# Altium PCB PCB_BoargV1_1.PcbDoc
Units mm, origin at the board's own origin, x right, y up, seen from the top; angles counter-clockwise.
Board outline 66.68 x 33.27 mm, 2 copper layers (Top Layer, Bottom Layer); 57 components, 60 nets, 253 pads, 26 vias.
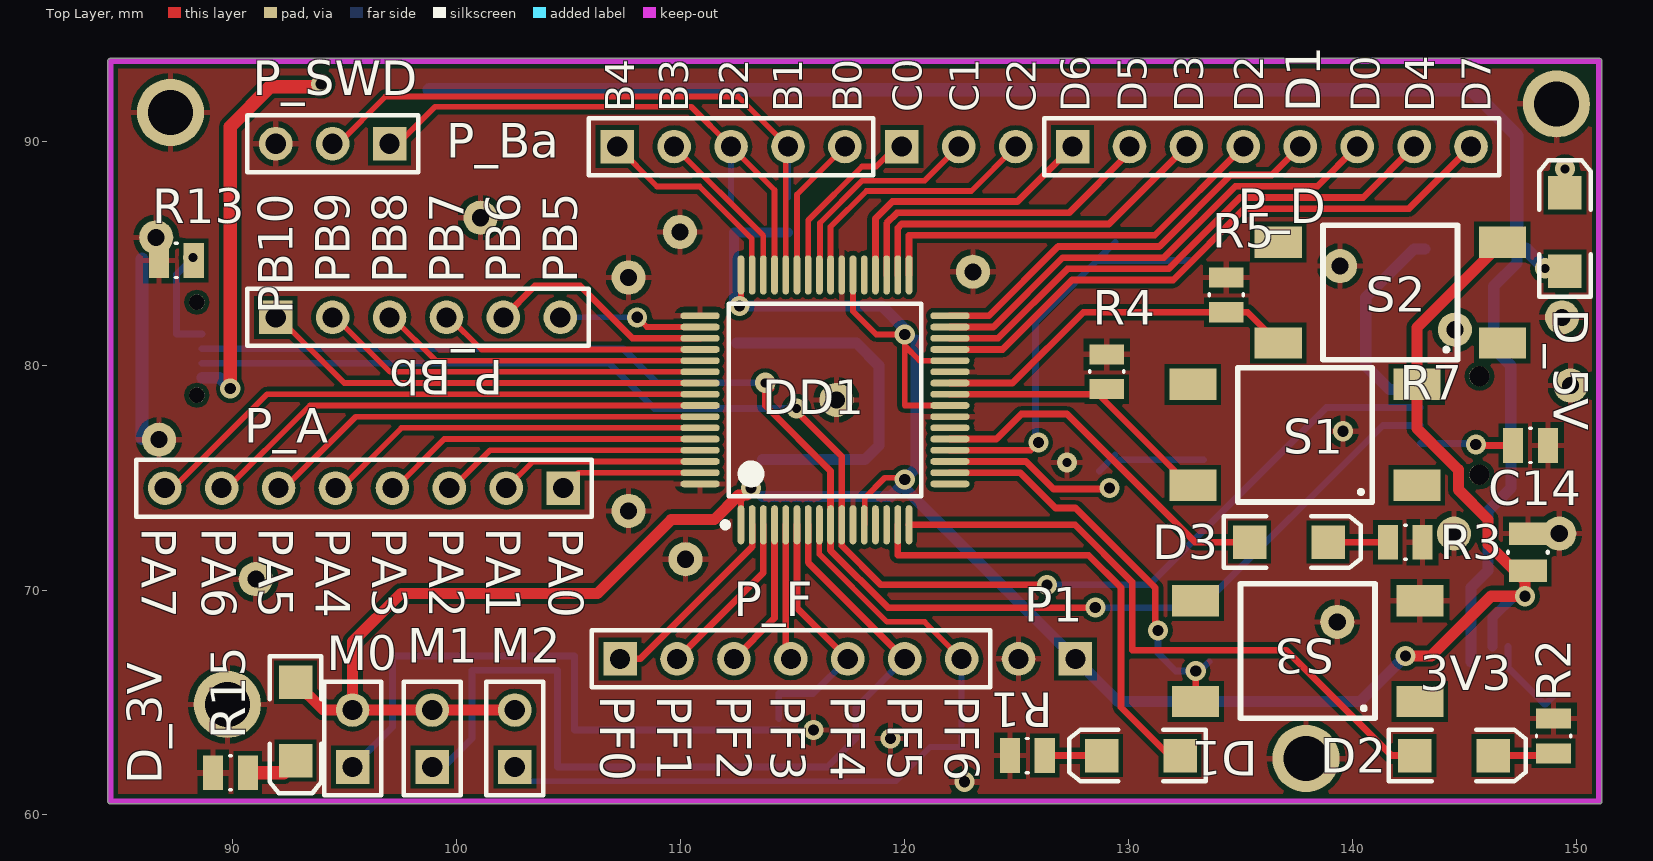
[diagram p0: Top Layer view]
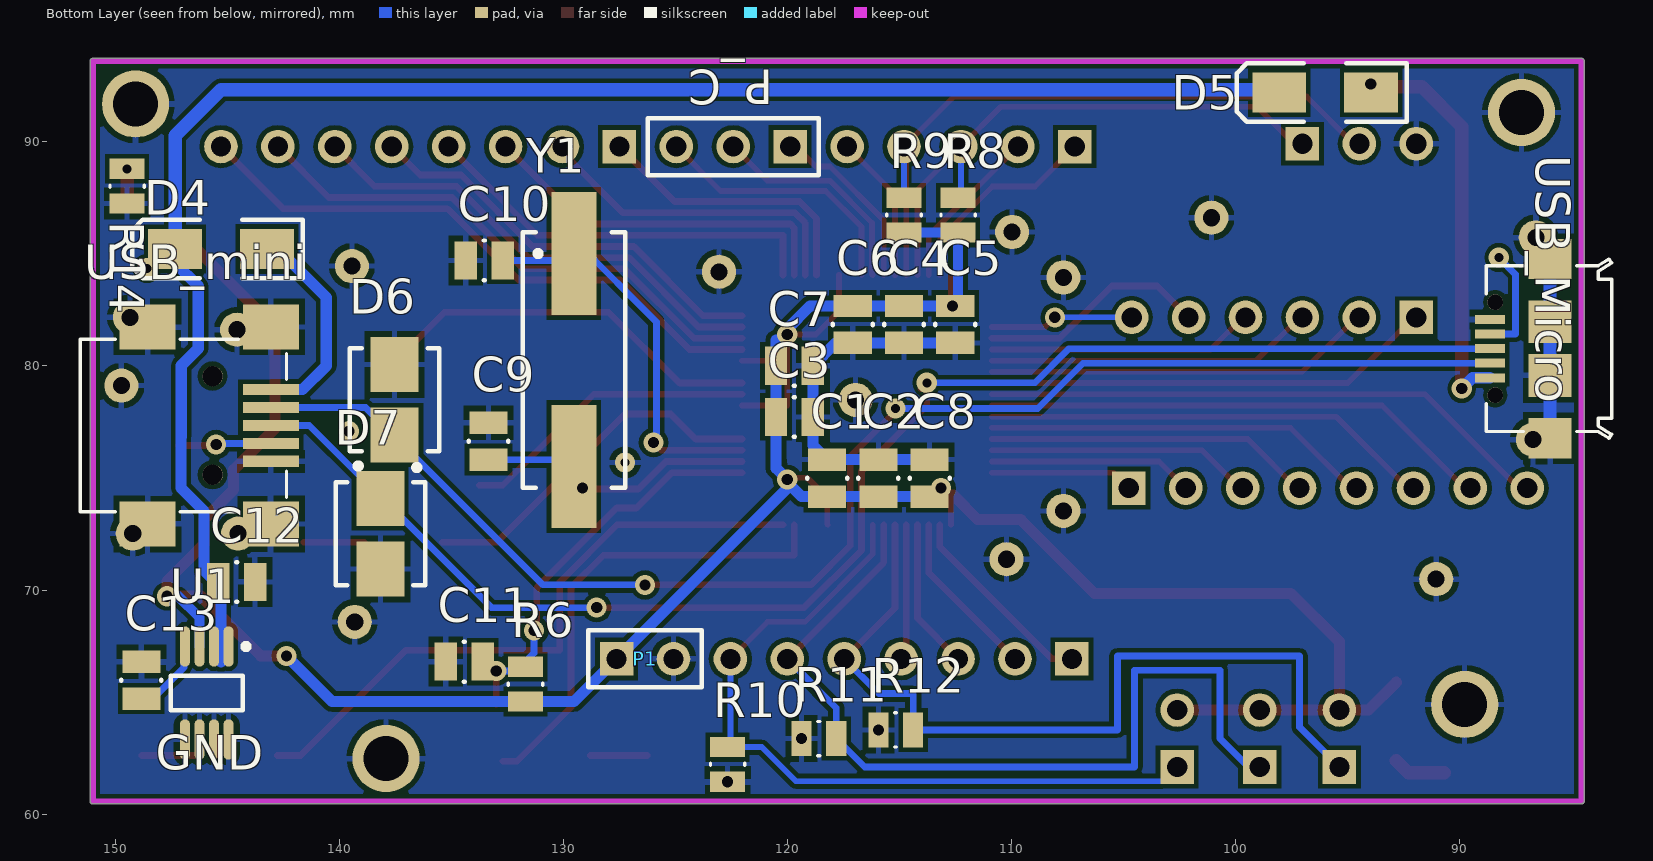
[diagram p1: Bottom Layer view, seen from below]
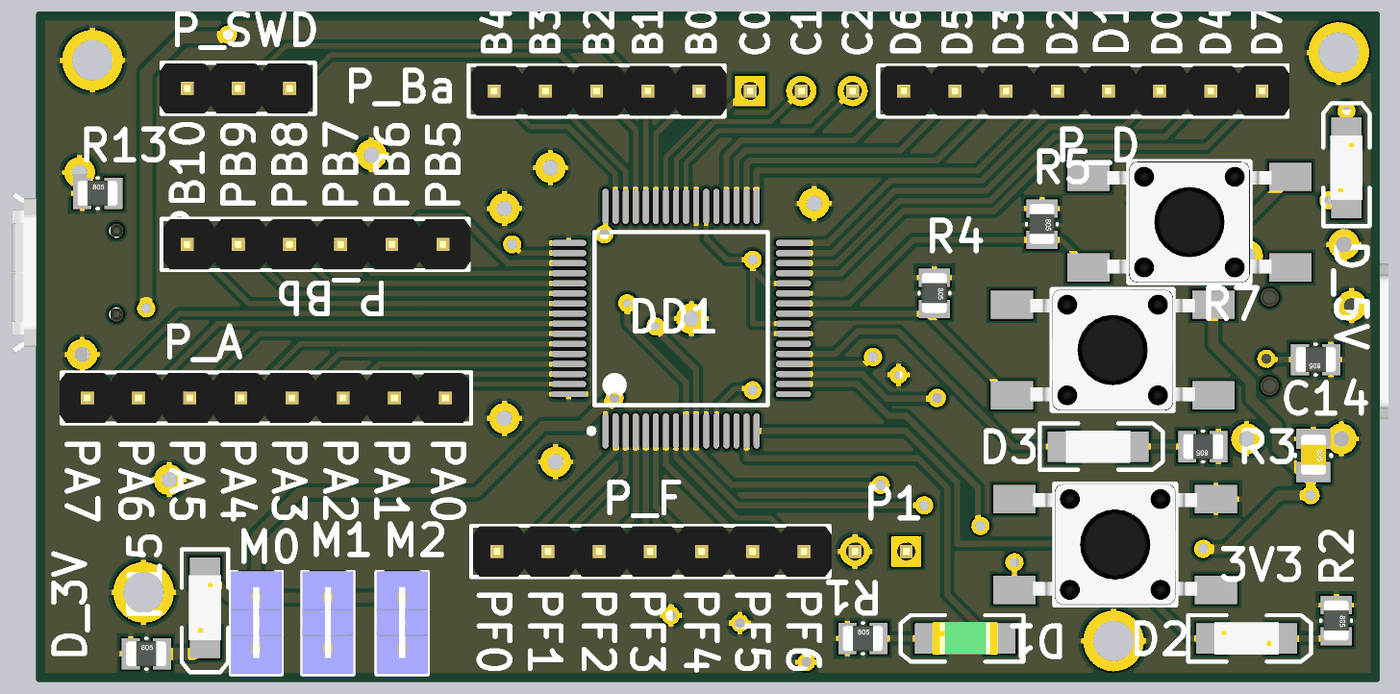
[diagram p2: 3D render of the assembled board from above, using the file's embedded part models]
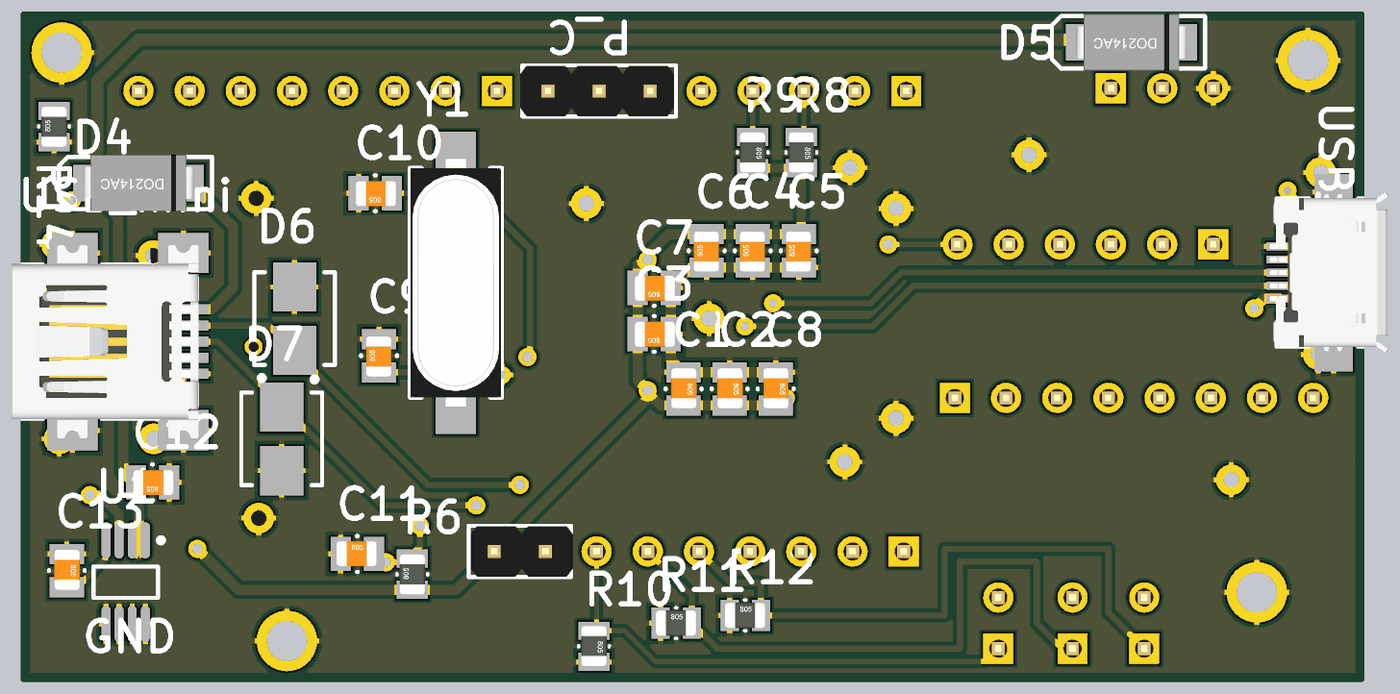
[diagram p3: 3D render of the assembled board from below, using the file's embedded part models]

## Layer stack, top to bottom
Top Solder: solder mask 0.0102, Solder Resist, Dk 3.5
Top Layer: signal copper 0.0356
Dielectric 1: dielectric 0.32, FR-4, Dk 4.8
Bottom Layer: signal copper 0.0356
Bottom Solder: solder mask 0.0102, Solder Resist, Dk 3.5

## Board outline
84.455,60.579 ccw(c84.582,60.579) 84.582,60.452 151.003,60.452 ccw(c151.003,60.579) 151.13,60.579 151.13,93.599 ccw(c151.003,93.599) 151.003,93.726 84.582,93.726 ccw(c84.582,93.599) 84.455,93.599

## Design rules (kind name [scope] priority, off if disabled: settings)
Clearance [All] p1: gap=0.2
PolygonConnect [All] p1: connectstyle=Relief reliefconductorwidth=0.254 reliefentries=4 polygonreliefangle="90 Angle" airgapwidth=0.254
RoutingVias [All] p1: holewidth=0.6 width=1.27 viastyle="Through Hole" minholewidth=0.4 minwidth=0.8 maxholewidth=0.5 maxwidth=0.9
SolderMaskExpansion [All] p1: expansion=0.102
Width Width_3V3 [InNet('3.3V')] p1: maxlimit=0.9 minlimit=0.254 preferedwidth=0.5
Width Width_5V [InNet('5V')] p2: maxlimit=0.9 minlimit=0.254 preferedwidth=0.5
Width Width_GND [InNet('GND')] p3: maxlimit=0.9 minlimit=0.254 preferedwidth=0.5 minimp=50.000000 maximp=50.000000 favimp=50.000000
Width [All] p4: maxlimit=0.6 minlimit=0.254 preferedwidth=0.3
29 further rules are at their usual default settings.

## Components (designator, comment, footprint, x,y, rotation, side; value= is the part's Value field where it differs from the comment)
C1 "CAP" C0805C 118.237,75.819 r270 bottom
C2 "CAP" C0805C 115.951,75.819 r270 bottom
C3 "CAP" C0805C 118.872,77.724 r0 bottom
C4 "CAP" C0805C 114.808,81.026 r90 bottom
C5 "CAP" C0805C 112.522,81.026 r90 bottom
C6 "CAP" C0805C 117.094,81.026 r90 bottom
C7 "CAP" C0805C 118.872,80.01 r0 bottom
C8 "CAP" C0805C 113.665,75.819 r270 bottom
C9 "CAP" C0805C 133.35,75.819 r90 bottom
C10 "CAP" C0805C 132.715,84.709 r0 bottom
C11 "CAP" C0805C 135.255,66.802 r180 bottom
C12 "CAP" C0805C 143.764,70.358 r0 bottom
C13 "CAP" C0805C 148.844,66.802 r270 bottom
C14 "CAP" C0805C 147.828,72.517 r270 top
D1 "LED" LED1206G 130.556,62.611 r180 top
D2 "LED" LED1206R 144.526,62.611 r0 top
D3 "LED" LED1206Y 137.16,72.136 r0 top
D4 "Diode" DSO-C2/X1.8 145.288,85.217 r0 bottom
D5 "Diode" DSO-C2/X1.8 96.012,92.202 r0 bottom
D6 "DiodeTVS" DIOM4336X22N 137.541,78.486 r90 bottom
D7 "DiodeTVS" DIOM4336X22N 138.176,72.517 r270 bottom
D_3V "LED" LED1206R 92.837,64.135 r270 top
D_5V "LED" LED1206R 149.479,85.979 r90 top
DD1 "К1986ВЕ92Q" TSQFP50P1200X1200X160-64N 116.459,78.486 r90 top
M0 "Header 2" HDR1X2J 95.377,62.103 r90 top
M1 "Header 2" HDR1X2J 98.933,62.103 r90 top
M2 "Header 2" HDR1X2J 102.616,62.103 r90 top
P1 "Header 2" HDR1X2 127.635,66.929 r180 bottom
P_A "Header 8" HDR1X8 104.775,74.549 r180 top
P_Ba "Header 5" HDR1X5 107.188,89.789 r0 top
P_Bb "Header 6" HDR1X6 91.948,82.169 r0 top
P_C "Header 3" HDR1X3 119.888,89.789 r0 bottom
P_D "Header 8" HDR1X8 127.508,89.789 r0 top
P_F "Header 7" HDR1X7 107.315,66.929 r0 top
P_SWD "Header 3" HDR1X3 97.028,89.916 r180 top
R1 "RES" C0805R 124.714,62.611 r0 top
R2 "RES" C0805R 148.971,64.262 r270 top
R3 "RES" C0805R 143.129,72.136 r180 top
R4 "RES" C0805R 129.032,80.518 r270 top
R5 "RES" C0805R 134.366,83.947 r270 top
R6 "RES" C0805R 131.699,65.024 r90 bottom
R7 "RES" C0805R 148.717,76.454 r180 top
R8 "RES" C0805R 112.395,87.503 r270 bottom
R9 "RES" C0805R 114.808,87.503 r270 bottom
R10 "RES" C0805R 122.682,62.992 r270 bottom
R11 "RES" C0805R 119.38,63.373 r180 bottom
R12 "RES" C0805R 115.951,63.754 r180 bottom
R13 "RES" C0805R 86.741,84.709 r0 top
R14 "RES" C0805R 149.479,87.249 r90 bottom
R15 "RES" C0805R 89.154,61.849 r0 top
S1 "SPST-NO" SPST-NO 142.875,74.676 r90 top
S2 "SPST-NO" SPST-NO 146.685,81.026 r90 top
S3 "SPST-NO" SPST-NO 143.002,65.024 r90 top
U1 "ADP1715ARMZ-3.3-R7" ADI-RM-8_N 145.923,65.405 r270 bottom
USB_Micro "Micro USB 2.0 Type B" 629105136821 85.979,80.772 r90 bottom
USB_mini "Mini USB 2.0 Type B" 65100516121 146.939,77.343 r270 bottom
Y1 "XTAL" "HC49SMD C" 129.54,80.264 r270 bottom

## Footprints (in the part's own frame and the unit in brackets; to place one, negate y for a bottom-side part, rotate by r counter-clockwise, add the part's x,y. Pads: shape width x height; smd on the part's side, far side on the other; paste and mask are expansions set on the pad)
65100516121 [mm] "Mini USB 2.0 Type B SMT Horizontal 5 Contacts"
  rect 0.5x2.5 smd: 1(-1.6,3.875) 2(-0.8,3.875) 3(0,3.875) 4(0.8,3.875) 5(1.6,3.875)
  round 0.9 hole 0.9 unplated: M1(-2.2,1.275) M2(2.2,1.275)
  rect 2x2.5 smd: S1(-4.4,3.875) S2(4.4,3.875) S3(-4.4,-1.625) S4(4.4,-1.625)
  silkscreen extent -3.85,-4.62 3.85,4.58, body extent -4.8,-4.62 4.8,4.63, height 3.92
629105136821 [mm] "Micro USB 2.0 SMT Type B Horizontal 5 Contacts"
  rect 0.4x1.35 smd: 1(-1.3,2.675) 2(-0.65,2.675) 3(0,2.675) 4(0.65,2.675) 5(1.3,2.675)
  round 0.7 hole 0.7 unplated: M1(-2.075,2.45) M2(2.075,2.45)
  rect 1.8x1.9 smd: S1(-4,0) S4(4,0)
  rect 1.9x1.9 smd: S2(-1.2,0) S3(1.2,0)
  silkscreen extent -4,-2.75 4,2.85, body extent -4,-2.73 4,3.17, height 2.77
ADI-RM-8_N [mm] "SOP, 8-Leads, Body 3x3mm, Pitch 0.65mm, IPC Medium Density"
  oval 1.8x0.45 smd: 1(-2.075,0.975) 2(-2.075,0.325) 3(-2.075,-0.325) 4(-2.075,-0.975) 5(2.075,-0.975) 6(2.075,-0.325) 7(2.075,0.325) 8(2.075,0.975)
  silkscreen extent -2.2,-1.6 0.77,1.87, body extent -1.6,-1.6 1.6,1.6, height 1.1
C0805C [mm]
  rect 1x1.7 smd: 1(0,0) 2(1.65,0)
  silkscreen extent 0.8,-0.89 0.85,0.89, body extent -0.21,-0.61 1.79,0.64, height 0.78
C0805R [mm]
  rect 0.9x1.55 smd: 1(0,0) 2(1.55,0)
  silkscreen extent 0.73,-0.76 0.81,0.76, body extent -0.24,-0.62 1.76,0.63, height 0.78
DIOM4336X22N [mm] "Molded Diode, 2-Leads, Body 4,31x3,62mm, IPC Medium Density"
  rect 2.45x2.15 smd: A(1.575,0) K(-1.575,0)
  silkscreen extent -3.07,-2 2.3,2, body extent -2.29,-1.97 2.28,1.97, height 2.25
DSO-C2/X1.8 [mm] "Diode; DO-214-AC/SMA; 2 C-Bend Leads; Body 5 x 2.7 mm, inc. leads (LxW)"
  rect 2.4x1.8 smd: A(-2.05,0) K(2.05,0)
  silkscreen extent -3.65,-1.3 3.95,1.3, body extent -2.74,-1.4 2.74,1.4, height 2.28
"HC49SMD C" [mm] "Quartz Crystal, SMD thickness C; Body 13.4 (inc. leads) x 4.9 mm (LxW max)"
  rect 5.5x2 smd: 1(-4.75,0) 2(4.75,0)
  silkscreen extent -5.7,-2.29 5.7,2.29, body extent -6.15,-2.25 6.15,2.25, height 3.6
HDR1X2 [mm] "Connector; Header; 2 Position"
  rect 1.5x1.5 hole 0.9: 1(0,0)
  round 1.5 hole 0.9: 2(2.54,0)
  silkscreen extent -1.27,-1.27 3.81,1.27, body extent -1.17,-1.25 3.91,1.25, height 8.2
HDR1X2J [mm] "Jumper; Connector; Header; 2 Position"
  rect 1.5x1.5 hole 0.9: 1(0,0)
  round 1.5 hole 0.9: 2(2.54,0)
  silkscreen extent -1.27,-1.27 3.81,1.27, body extent -1.24,-1.27 3.91,1.27, height 8.55
HDR1X3 [mm] "Connector; Header; 3 Position"
  rect 1.5x1.5 hole 0.9: 1(0,0)
  round 1.5 hole 0.9: 2(2.54,0) 3(5.08,0)
  silkscreen extent -1.27,-1.27 6.35,1.27, body extent -1.17,-1.25 6.45,1.25, height 8.2
HDR1X5 [mm] "Connector; Header; 5 Position"
  rect 1.5x1.5 hole 0.9: 1(0,0)
  round 1.5 hole 0.9: 2(2.54,0) 3(5.08,0) 4(7.62,0) 5(10.16,0)
  silkscreen extent -1.27,-1.27 11.43,1.27, body extent -1.17,-1.25 11.53,1.25, height 8.2
HDR1X6 [mm] "Connector; Header; 6 Position"
  rect 1.5x1.5 hole 0.9: 1(0,0)
  round 1.5 hole 0.9: 2(2.54,0) 3(5.08,0) 4(7.62,0) 5(10.16,0) 6(12.7,0)
  silkscreen extent -1.27,-1.27 13.97,1.27, body extent -1.17,-1.25 14.07,1.25, height 8.2
HDR1X7 [mm] "Connector; Header; 7 Position"
  rect 1.5x1.5 hole 0.9: 1(0,0)
  round 1.5 hole 0.9: 2(2.54,0) 3(5.08,0) 4(7.62,0) 5(10.16,0) 6(12.7,0) 7(15.24,0)
  silkscreen extent -1.27,-1.27 16.51,1.27, body extent -1.17,-1.25 16.61,1.25, height 8.2
HDR1X8 [mm] "Connector; Header; 8 Position"
  rect 1.5x1.5 hole 0.9: 1(0,0)
  round 1.5 hole 0.9: 2(2.54,0) 3(5.08,0) 4(7.62,0) 5(10.16,0) 6(12.7,0) 7(15.24,0) 8(17.78,0)
  silkscreen extent -1.27,-1.27 19.05,1.27, body extent -1.17,-1.25 19.15,1.25, height 8.2
LED1206G [mm] "SMT LED; 2 Flat Leads; 3.2X1.6X1.1"
  rect 1.5x1.5 smd: 1(-1.75,0) 2(1.75,0)
  silkscreen extent -2.9,-1.15 3.2,1.15, body extent -1.6,-0.8 1.6,0.8, height 1.11
LED1206R [mm] "SMT LED; 2 Flat Leads; 3.2X1.6X1.1"
  rect 1.5x1.5 smd: 1(-1.75,0) 2(1.75,0)
  silkscreen extent -2.9,-1.15 3.2,1.15, body extent -1.6,-0.8 1.6,0.8, height 1.11
LED1206Y [mm] "SMT LED; 2 Flat Leads; 3.2X1.6X1.1"
  rect 1.5x1.5 smd: 1(-1.75,0) 2(1.75,0)
  silkscreen extent -2.9,-1.15 3.2,1.15, body extent -1.6,-0.8 1.6,0.8, height 1.11
SPST-NO [mm] "Tactile Switch SPST-NO 6x6mm"
  rect 1.4x2.1 smd: 1(0,0) 2(4.5,0) 3(4.5,10) 4(0,10)
  silkscreen extent -0.75,2 5.25,8, body extent -0.75,0.93 5.25,9.08, height 5
TSQFP50P1200X1200X160-64N [mm] "TSQFP, 64-Leads, Body 10,00x10,00mm, Pitch 0,50mm, IPC Medium Density"
  oval 1.75x0.3 smd: 1(-5.575,3.75) 2(-5.575,3.25) 3(-5.575,2.75) 4(-5.575,2.25) 5(-5.575,1.75) 6(-5.575,1.25) 7(-5.575,0.75) 8(-5.575,0.25) 9(-5.575,-0.25) 10(-5.575,-0.75) 11(-5.575,-1.25) 12(-5.575,-1.75) 13(-5.575,-2.25) 14(-5.575,-2.75) 15(-5.575,-3.25) 16(-5.575,-3.75) 33(5.575,-3.75) 34(5.575,-3.25) 35(5.575,-2.75) 36(5.575,-2.25) 37(5.575,-1.75) 38(5.575,-1.25) 39(5.575,-0.75) 40(5.575,-0.25) 41(5.575,0.25) 42(5.575,0.75) 43(5.575,1.25) 44(5.575,1.75) 45(5.575,2.25) 46(5.575,2.75) 47(5.575,3.25) 48(5.575,3.75)
  oval 0.3x1.75 smd: 17(-3.75,-5.575) 18(-3.25,-5.575) 19(-2.75,-5.575) 20(-2.25,-5.575) 21(-1.75,-5.575) 22(-1.25,-5.575) 23(-0.75,-5.575) 24(-0.25,-5.575) 25(0.25,-5.575) 26(0.75,-5.575) 27(1.25,-5.575) 28(1.75,-5.575) 29(2.25,-5.575) 30(2.75,-5.575) 31(3.25,-5.575) 32(3.75,-5.575) 49(3.75,5.575) 50(3.25,5.575) 51(2.75,5.575) 52(2.25,5.575) 53(1.75,5.575) 54(1.25,5.575) 55(0.75,5.575) 56(0.25,5.575) 57(-0.25,5.575) 58(-0.75,5.575) 59(-1.25,5.575) 60(-1.75,5.575) 61(-2.25,5.575) 62(-2.75,5.575) 63(-3.25,5.575) 64(-3.75,5.575)
  silkscreen extent -5.7,-4.3 4.3,4.57, body extent -5,-5 5,5, height 1.6

## Part data
C1 C2 C3 C4 C5 C6 C7 C8 C9 C10 C11 C12 C13 C14: "Capacitor"
D1 D2 D3 D_3V D_5V: "Typical LED"
D4 D5: "Default Diode"
D6 D7: "Diode TVS"
M0 M1 M2 P1: "Header, 2-Pin"
P_A P_D: "Header, 8-Pin"
P_Ba: "Header, 5-Pin"
P_Bb: "Header, 6-Pin"
P_C P_SWD: "Header, 3-Pin"
P_F: "Header, 7-Pin"
R1 R2 R3 R4 R5 R6 R7 R8 R9 R10 R11 R12 R13 R14 R15: "Resistor"
S1 S2 S3: "Tactile Switch 7.3mm, SMD"
U1: "500 mA, Low Dropout, CMOS Linear Regulator, 2.5 to 5.5 V Vin, 3.3 V Vout, Industrial, 8-pin SOP (RM-8), Reel"
USB_Micro: library part 629105136821, "Micro USB 2.0 Type B Horizontal SMT 5 Contacts WR-COM"
USB_mini: library part 65100516121, "Mini USB 2.0 Type B Horizontal SMT 5 Contacts WR-COM"
Y1: "Crystal Oscillator"

## Free pads (board coordinates)
  round 3 hole 2: 0(87.249,91.313) 1(89.789,64.897) 2(137.922,62.484) 3(149.098,91.694)
  round 1.524 hole 0.762: 0(91.059,70.485) 0(144.568,81.616) 0(149.225,72.517) 0(149.733,79.121) 1(101.092,86.614) 1(144.526,72.517) 1(149.352,82.169) 2(86.741,76.708) 3(86.614,85.738) 4(109.982,85.979) 5(107.696,83.947) 7(116.967,78.486) 8(110.236,71.374) 10(139.446,84.455) 11(139.319,68.58) 12(107.696,73.533) 13(123.063,84.201)

## Via types
v1: diameter 0.9, hole 0.5, Top Layer to Bottom Layer, 20 vias
v2: diameter 0.9, hole 0.4, Top Layer to Bottom Layer, 6 vias

## Nets (pads, with @x,y where several pads share a name; then routed paths per layer and width w, separated by ;. In a path a pad name is that pad's centre, name@x,y a point inside that pad or via, vN(x,y) a via of type N, cw(c..) or ccw(c..) an arc to the next point about the centre after c; other vN are vias at no path point)
3.3V: C1.2 C2.2 C3.2 C4.2 C5.2 C6.2 C7.2 C8.2 C14.2 D_3V.1 DD1.1 DD1.12 DD1.24 DD1.28 DD1.38 DD1.48 M0.2 M1.2 M2.2 P1.1 R6.1 R8.2 R9.2 S1.2 S2.2 U1.3 | length 135.2
  Top Layer w0.254: v1(112.649,82.677) 112.709,82.737 DD1.48 ; DD1.1 112.709,73.974 v1@112.971,74.236 ; v1@113.157,74.422 v1(113.157,74.549) ; DD1.38 117.709,82.443 118.745,81.407 v1(120.015,81.407) 120.015,80.899 ; DD1.12 118.232,72.934 118.232,74.113 119.126,75.007 119.938,75.007 v1(120.015,74.93) ; DD1.24 120.015,78.236 120.015,80.899 ; DD1.28 120.678,80.236 120.015,80.899
  Top Layer w0.5: D_3V.1 94.079,64.643 M0.2 ; M2.2 M1.2 M0.2 ; v1@113.157,74.422 112.971,74.236 112.609,74.236 111.525,73.152 109.601,73.152 106.299,69.85 97.536,69.85 95.377,67.691 M0.2 ; v1(142.367,67.056) 143.51,67.056 146.177,69.723 v1(147.701,69.723) 147.701,70.394 146.05,72.045 146.05,73.152 144.726,74.476 144.726,75.365 142.875,77.216 S1.2 142.875,81.716 S2.2
  Bottom Layer w0.254: v1(113.157,74.549) C8.2@113.285,74.549 ; v1(120.015,81.407) v1@120.015,81.661
  Bottom Layer w0.45: v1(112.649,82.677) 112.395,82.929 R8.2 R9.2 ; U1.3 146.248,68.778 147.193,69.723 v1(147.701,69.723)
  Bottom Layer w0.5: v1(112.649,82.677) C4.2 C6.2 119,82.676 v1@120.015,81.661 ; C8.2 C2.2 C1.2 119.381,74.169 v1@120.015,74.803 ; v1@120.015,74.549 P1.1 129.54,65.024 140.335,65.024 v1(142.367,67.056) ; v1(120.015,74.93) 120.522,75.437 C3.2 C7.2 120.522,81.154
5V: C12.2 D4.K D5.K D_5V.1 U1.1 U1.2 | length 75.9
  Bottom Layer w0.5: 145.288,66.802 145.288,70.104 146.05,70.866 146.05,73.533 147.066,74.549 147.066,76.835 147.061,76.835 147.061,80.015 146.304,80.772 146.304,83.566 147.338,84.6 D4.K
  Bottom Layer w0.6: D5.K@98.806,92.329 145.288,92.329 147.338,90.279 D4.K 147.729,85.217 v2(148.59,84.356)
GND: C1.1 C2.1 C3.1 C4.1 C5.1 C6.1 C7.1 C8.1 C9.2 C10.2 C11.1 C12.1 C13.1 C14.1 D6.A D7.A DD1.11 DD1.23 DD1.27 DD1.39 DD1.49 DD1.64 P1.2 P_SWD.3 pad.0 pad.1 pad.2 pad.3 pad.4 pad.5 pad.7 pad.8 pad.10 pad.11 pad.12 pad.13 R1.1 R2.1 R3.1 R4.1 R5.1 R7.1 R10.2 R11.1 R12.1 R13.1 R14.1 R15.1 S3.2 U1.5 U1.6 U1.7 U1.8 USB_Micro.5 USB_Micro.S1 USB_Micro.S2 USB_Micro.S3 USB_Micro.S4 USB_mini.5 USB_mini.S1 USB_mini.S2 USB_mini.S3 USB_mini.S4 | length 23.8
  Bottom Layer w0.5: C5.1 117.856,81.026 C7.1 118.872,76.454 C1.1 C8.1
  Bottom Layer w0.6: USB_Micro.S1 USB_Micro.S3 USB_Micro.S4
  other v1: 122.682,61.442 119.38,63.373 115.951,63.754 139.573,77.089
  other v2: 127.254,75.692
NetC9_1: C9.1 DD1.19 Y1.2 | length 12.4
  Top Layer w0.3: DD1.19 125.432,75.736 126.657,74.511 129.121,74.511 v1(129.159,74.549)
  Bottom Layer w0.3: Y1.2@128.702,75.311 Y1.2@129.413,76.022 ; Y1.2@129.616,75.819 C9.1
NetC10_1: C10.1 DD1.20 Y1.1 | length 20
  Top Layer w0.3: DD1.20 125.639,76.236 v1(125.984,76.581)
  Bottom Layer w0.3: v1@125.857,76.327 125.857,81.966 129.413,85.522 128.6,84.709 C10.1
NetC13_2: C13.2 U1.4 | length 3.8
  Bottom Layer w0.3: U1.4@146.939,67.48 146.939,66.548 148.59,64.897 C13.2@148.971,65.278
NetD1_1: D1.1 DD1.15 | length 21.3
  Top Layer w0.3: DD1.15 119.709,71.553 128.218,71.553 129.667,70.104 129.667,64.77 132.08,62.357 D1.1@132.715,62.357
NetD1_2: D1.2 R1.2 | length 2.5
  Top Layer w0.3: R1.2 D1.2
NetD2_1: D2.1 DD1.16 | length 28.6
  Top Layer w0.3: DD1.16 127.622,72.911 130.167,70.366 130.167,67.31 131.396,67.31 131.401,67.315 137.028,67.315 141.732,62.611 D2.1
NetD2_2: D2.2 R2.2 | length 2.5
  Top Layer w0.3: D2.2 R2.2@148.818,62.611
NetD3_1: D3.1 DD1.21 | length 16.2
  Top Layer w0.3: DD1.21 124.107,76.736 125.222,77.851 127.254,77.851 132.969,72.136 D3.1
NetD3_2: D3.2 R3.2 | length 2.7
  Top Layer w0.3: D3.2 R3.2
NetD4_A: D4.A USB_mini.1 | length 9.5
  Bottom Layer w0.5: USB_mini.1 141.656,78.943 140.589,80.01 140.589,83.058 142.748,85.217 D4.A
NetD5_A: D5.A USB_Micro.1 | length 17.5
  Top Layer w0.6: v1(89.916,78.994) 89.916,90.678 91.694,92.456 v1@93.581,92.456
  Bottom Layer w0.5: USB_Micro.1 89.438,79.472 v1(89.916,78.994)
  other v1: 93.98,92.583
NetD6_K: D6.K DD1.10 USB_Micro.2 USB_mini.2 | length 64.2
  Top Layer w0.3: v2(115.189,78.105) 115.189,77.978 117.209,75.958 DD1.10 117.209,71.979 118.957,70.231 v1(126.365,70.231)
  Bottom Layer w0.3: USB_Micro.2 106.822,80.122 108.839,78.105 v2(115.189,78.105) ; v1(126.365,70.231) 130.922,70.231 138.834,78.143 USB_mini.2@143.026,78.143
NetD7_K: D7.K DD1.9 USB_Micro.3 USB_mini.3 | length 65.6
  Top Layer w0.3: v2@114.046,78.994 v2(113.792,79.248) 113.792,78.232 116.709,75.315 DD1.9 116.709,71.772 119.266,69.215 v1(128.524,69.215)
  Bottom Layer w0.3: USB_Micro.3 107.442,80.772 108.966,79.248 v2(113.792,79.248) ; v1(128.524,69.215) 133.223,69.215 141.351,77.343 USB_mini.3@143.026,77.343
NetD_3V_2: D_3V.2 R15.2 | length 2.4
  Top Layer w0.6: R15.2 92.301,61.849 D_3V.2
NetD_5V_2: D_5V.2 R14.2 | length 1.1
  Top Layer w0.6: D_5V.2 v2(149.479,88.799)
NetDD1_2: DD1.2 P_F.1 | length 8.9
  Top Layer w0.3: P_F.1 108.211,66.929 113.209,71.927 DD1.2
NetDD1_3: DD1.3 P_F.2 | length 7.6
  Top Layer w0.3: P_F.2 113.709,70.783 DD1.3
NetDD1_4: DD1.4 P_F.3 | length 6.7
  Top Layer w0.3: P_F.3 114.209,68.743 DD1.4
NetDD1_5: DD1.5 P_F.4 | length 6.1
  Top Layer w0.3: DD1.5 114.709,67.155 P_F.4
NetDD1_6: DD1.6 M0.1 P_F.5 R12.2 | length 38
  Top Layer w0.3: DD1.6 115.209,69.195 P_F.5
  Bottom Layer w0.3: M0.1 97.155,63.881 97.155,67.056 105.283,67.056 105.283,63.754 R12.2 ; R12.2@114.401,64.262 114.401,65.379 115.925,65.379 P_F.5
NetDD1_7: DD1.7 M1.1 P_F.6 R11.2 | length 39.5
  Top Layer w0.3: DD1.7 115.709,71.235 P_F.6
  Bottom Layer w0.3: M1.1 99.441,62.103 100.711,63.373 100.711,66.421 104.521,66.421 104.521,62.103 116.56,62.103 R11.2 117.83,64.744 P_F.6
NetDD1_8: DD1.8 M2.1 P_F.7 R10.1 | length 34.4
  Top Layer w0.254: DD1.8 116.209,71.597 119.226,68.58 120.904,68.58 P_F.7
  Bottom Layer w0.254: M2.1 103.251,61.468 119.634,61.468 121.158,62.992 122.555,62.992 P_F.7
NetDD1_25: DD1.25 R4.2 S1.4 | length 13.4
  Top Layer w0.3: DD1.25 128.655,78.736 132.715,74.676 S1.4@133.764,74.676
NetDD1_26: DD1.26 R5.2 S2.4 | length 16.5
  Top Layer w0.3: DD1.26 124.829,79.236 127.99,82.397 135.314,82.397 S2.4
NetDD1_29: DD1.29 P_D.8 | length 27
  Top Layer w0.3: DD1.29 124.386,80.736 127.484,83.834 132.001,83.834 135.186,87.019 142.518,87.019 P_D.8
NetDD1_30: DD1.30 P_D.7 | length 24.3
  Top Layer w0.3: DD1.30 124.179,81.236 127.277,84.334 131.794,84.334 134.979,87.519 140.478,87.519 P_D.7
NetDD1_31: DD1.31 P_D.6 | length 21.5
  Top Layer w0.3: DD1.31 123.972,81.736 127.07,84.834 131.587,84.834 134.772,88.019 138.438,88.019 P_D.6
NetDD1_32: DD1.32 P_D.5 | length 18.8
  Top Layer w0.3: DD1.32 123.765,82.236 126.863,85.334 131.38,85.334 134.565,88.519 136.398,88.519 P_D.5
NetDD1_33: DD1.33 P_D.4 | length 18.3
  Top Layer w0.3: DD1.33 120.209,85.834 131.173,85.834 P_D.4
NetDD1_34: DD1.34 P_D.3 | length 16.5
  Top Layer w0.3: DD1.34 119.709,86.164 119.879,86.334 129.133,86.334 P_D.3
NetDD1_35: DD1.35 P_D.2 | length 14.7
  Top Layer w0.3: DD1.35 119.209,86.371 119.672,86.834 127.347,86.834 130.048,89.535 P_D.2
NetDD1_36: DD1.36 P_D.1 | length 12.6
  Top Layer w0.3: DD1.36 118.709,86.578 119.465,87.334 125.053,87.334 P_D.1
NetDD1_40: DD1.40 P_C.3 | length 11.9
  Top Layer w0.254: DD1.40 116.709,86.215 118.305,87.811 122.99,87.811 P_C.3
NetDD1_41: DD1.41 P_C.2 | length 9.9
  Top Layer w0.254: DD1.41 116.232,84.084 116.232,86.38 118.117,88.265 120.904,88.265 P_C.2
NetDD1_42: DD1.42 P_C.1 | length 8
  Top Layer w0.254: DD1.42 115.709,86.499 118.11,88.9 118.745,88.9 119.634,89.789 P_C.1
NetDD1_43: DD1.43 P_Ba.5 | length 6.6
  Top Layer w0.254: DD1.43 115.209,87.65 P_Ba.5
NetDD1_44: DD1.44 P_Ba.4 P_SWD.2 R9.1 | length 30
  Top Layer w0.254: P_SWD.2 94.742,89.916 96.847,92.021 112.576,92.021 P_Ba.4 ; DD1.44 P_Ba.4@114.709,89.69
  Bottom Layer w0.254: R9.1 P_Ba.4
NetDD1_45: DD1.45 P_Ba.3 P_SWD.1 R8.1 | length 25.1
  Top Layer w0.254: P_SWD.1@97.409,89.916 99.06,91.567 110.49,91.567 P_Ba.3 114.209,87.848 DD1.45
  Bottom Layer w0.254: R8.1@112.268,87.376 P_Ba.3@112.268,89.662
NetDD1_46: DD1.46 P_Ba.2 | length 7.4
  Top Layer w0.254: P_Ba.2 113.709,85.808 DD1.46
NetDD1_47: DD1.47 P_Ba.1 | length 9.3
  Top Layer w0.254: P_Ba.1 108.966,88.011 110.864,88.011 113.186,85.689 113.186,84.084 DD1.47
NetDD1_50: DD1.50 P_Bb.6 | length 7
  Top Layer w0.254: P_Bb.6 P_Bb.6@105.081,81.736 ; v1(108.077,82.169) 108.51,81.736 DD1.50
  Bottom Layer w0.254: P_Bb.6 v1(108.077,82.169)
NetDD1_51: DD1.51 P_Bb.5 | length 10.3
  Top Layer w0.3: P_Bb.5 103.505,83.566 105.537,83.566 107.867,81.236 DD1.51
NetDD1_52: DD1.52 P_Bb.4 | length 12.2
  Top Layer w0.254: P_Bb.4@99.695,82.55 99.695,82.169 101.128,80.736 DD1.52
NetDD1_53: DD1.53 P_Bb.3 | length 14.9
  Top Layer w0.254: P_Bb.3@97.155,82.55 97.155,82.169 99.088,80.236 DD1.53
NetDD1_54: DD1.54 P_Bb.2 | length 17.7
  Top Layer w0.254: P_Bb.2@94.615,82.55 94.615,82.169 97.048,79.736 DD1.54
NetDD1_55: DD1.55 P_Bb.1 | length 20.4
  Top Layer w0.254: P_Bb.1@92.075,82.55 92.075,82.169 95.008,79.236 DD1.55
NetDD1_56: DD1.56 P_A.8 | length 26
  Top Layer w0.254: P_A.8@86.995,74.041 P_A.8@86.995,74.295 ; P_A.8@86.995,74.168 91.563,78.736 DD1.56
NetDD1_57: DD1.57 P_A.7 | length 23.4
  Top Layer w0.254: P_A.7@89.535,74.041 P_A.7@89.535,74.422 ; P_A.7@89.535,74.295 93.476,78.236 DD1.57
NetDD1_58: DD1.58 P_A.6 | length 20.6
  Top Layer w0.254: P_A.6@92.075,74.041 P_A.6@92.075,74.422 ; P_A.6@92.075,74.295 95.516,77.736 DD1.58
NetDD1_59: DD1.59 P_A.5 | length 17.9
  Top Layer w0.254: P_A.5@94.615,74.041 P_A.5@94.615,74.422 ; P_A.5@94.615,74.295 97.556,77.236 DD1.59
NetDD1_60: DD1.60 P_A.4 | length 15.2
  Top Layer w0.254: P_A.4@97.155,74.041 P_A.4 ; P_A.4@97.155,74.422 99.469,76.736 DD1.60
NetDD1_61: DD1.61 P_A.3 | length 12.4
  Top Layer w0.254: P_A.3@99.695,74.041 P_A.3 ; P_A.3@99.695,74.422 101.509,76.236 DD1.61
NetDD1_62: DD1.62 P_A.2 | length 9.6
  Top Layer w0.254: P_A.2@102.235,74.041 P_A.2 103.422,75.736 DD1.62
NetDD1_63: DD1.63 P_A.1 | length 6.4
  Top Layer w0.254: P_A.1 105.462,75.236 DD1.63
NetR7_2: R7.2 USB_mini.4 | length 4.3
  Top Layer w0.3: v1(145.504,76.492) 145.466,76.454 R7.2
  Bottom Layer w0.3: USB_mini.4@143.026,76.543 145.504,76.543 v1(145.504,76.492)
NetR13_2: R13.2 USB_Micro.4 | length 4.9
  Bottom Layer w0.3: v2(88.265,84.836) 87.518,84.089 87.518,81.422 USB_Micro.4
RESET: C11.2 DD1.18 R6.2 S3.4 | length 18.6
  Top Layer w0.3: DD1.18 125.17,75.236 126.746,73.66 127.635,73.66 131.191,70.104 131.191,68.199 v1(131.318,68.199) ; S3.4@133.002,64.897 v1(133.002,66.388)
  Bottom Layer w0.3: v1(131.318,68.199) 131.318,67.183 132.113,66.388 v1(133.002,66.388) 133.318,66.515 C11.2
pads on no net: DD1.13 DD1.14 DD1.17 DD1.22 DD1.37 S1.1 S1.3 S2.1 S2.3 S3.1 S3.3 USB_Micro.M1 USB_Micro.M2 USB_mini.M1 USB_mini.M2

## Polygon pours and split planes (outlines as drawn)
GND on Top Layer "Top Layer-No Net" (solid, pour order 6): 84.582,93.599 84.582,60.579 151.003,60.579 151.003,93.599
GND on Bottom Layer "Top Layer-No Net" (solid, pour order 4): 84.582,93.599 84.582,60.198 151.003,60.198 151.003,93.599

## Keep-outs
Keep-Out Layer:
  lines w0.254: 84.582,60.579 151.003,60.579 151.003,93.599 84.582,93.599 84.582,60.579

## Silkscreen, mask and mechanical layers (free items; w line width, h text height)
Top Overlay:
  text "B4" at 107.95,91.313 h1.3 r90
  text "B3" at 110.363,91.313 h1.3 r90
  text "B2" at 113.03,91.313 h1.3 r90
  text "B1" at 115.443,91.313 h1.3 r90
  text "B0" at 118.11,91.313 h1.3 r90
  text "C0" at 120.777,91.313 h1.3 r90
  text "C1" at 123.317,91.313 h1.3 r90
  text "C2" at 125.857,91.313 h1.3 r90
  text "D6" at 128.27,91.313 h1.3 r90
  text "D5" at 130.81,91.313 h1.3 r90
  text "D3" at 133.35,91.313 h1.3 r90
  text "D2" at 136.017,91.313 h1.3 r90
  text "D1" at 138.557,91.313 h1.52 r90
  text "D0" at 141.224,91.313 h1.3 r90
  text "D4" at 143.637,91.313 h1.3 r90
  text "D7" at 146.177,91.313 h1.3 r90
  text "PB9" at 95.25,83.693 h1.52 r90
  text "PB8" at 97.79,83.693 h1.52 r90
  text "PB7" at 100.33,83.693 h1.52 r90
  text "PB6" at 102.87,83.693 h1.52 r90
  text "PB5" at 105.41,83.693 h1.52 r90
  text "PB10" at 92.71,82.296 h1.52 r90
  text "PA7" at 85.979,72.771 h1.52 r270
  text "PA6" at 88.646,72.771 h1.52 r270
  text "PA5" at 91.186,72.771 h1.52 r270
  text "PA4" at 93.726,72.771 h1.52 r270
  text "PA3" at 96.266,72.771 h1.52 r270
  text "PA2" at 98.806,72.771 h1.52 r270
  text "PA1" at 101.346,72.771 h1.52 r270
  text "PA0" at 104.14,72.771 h1.52 r270
  text "3V3" at 143.002,65.532 h1.52
  text "PF0" at 106.426,65.278 h1.52 r270
  text "PF1" at 108.966,65.278 h1.52 r270
  text "PF2" at 111.633,65.278 h1.52 r270
  text "PF3" at 114.046,65.278 h1.52 r270
  text "PF4" at 116.713,65.278 h1.52 r270
  text "PF5" at 119.253,65.278 h1.52 r270
  text "PF6" at 121.793,65.278 h1.52 r270
Bottom Overlay:
  text "GND" at 148.209,61.976 h1.52

## Dimensions
151.003,60.579 to 84.582,60.579 on Keep-Out Layer
151.003,93.599 to 151.003,60.579 on Keep-Out Layer

## Text inside footprints (layer, text, board x,y; h text height)
USB_Micro: Mechanical 1 "PCB Edge" at 83.879,79.372 h0.76 r270